# Altium PCB PCB_second.PcbDoc
Units mil, origin at the board's own origin, x right, y up, seen from the top; angles counter-clockwise.
Board outline 3555 x 3865 mil, 2 copper layers (Top Layer, Bottom Layer); 60 components, 127 nets, 227 pads, 81 vias.
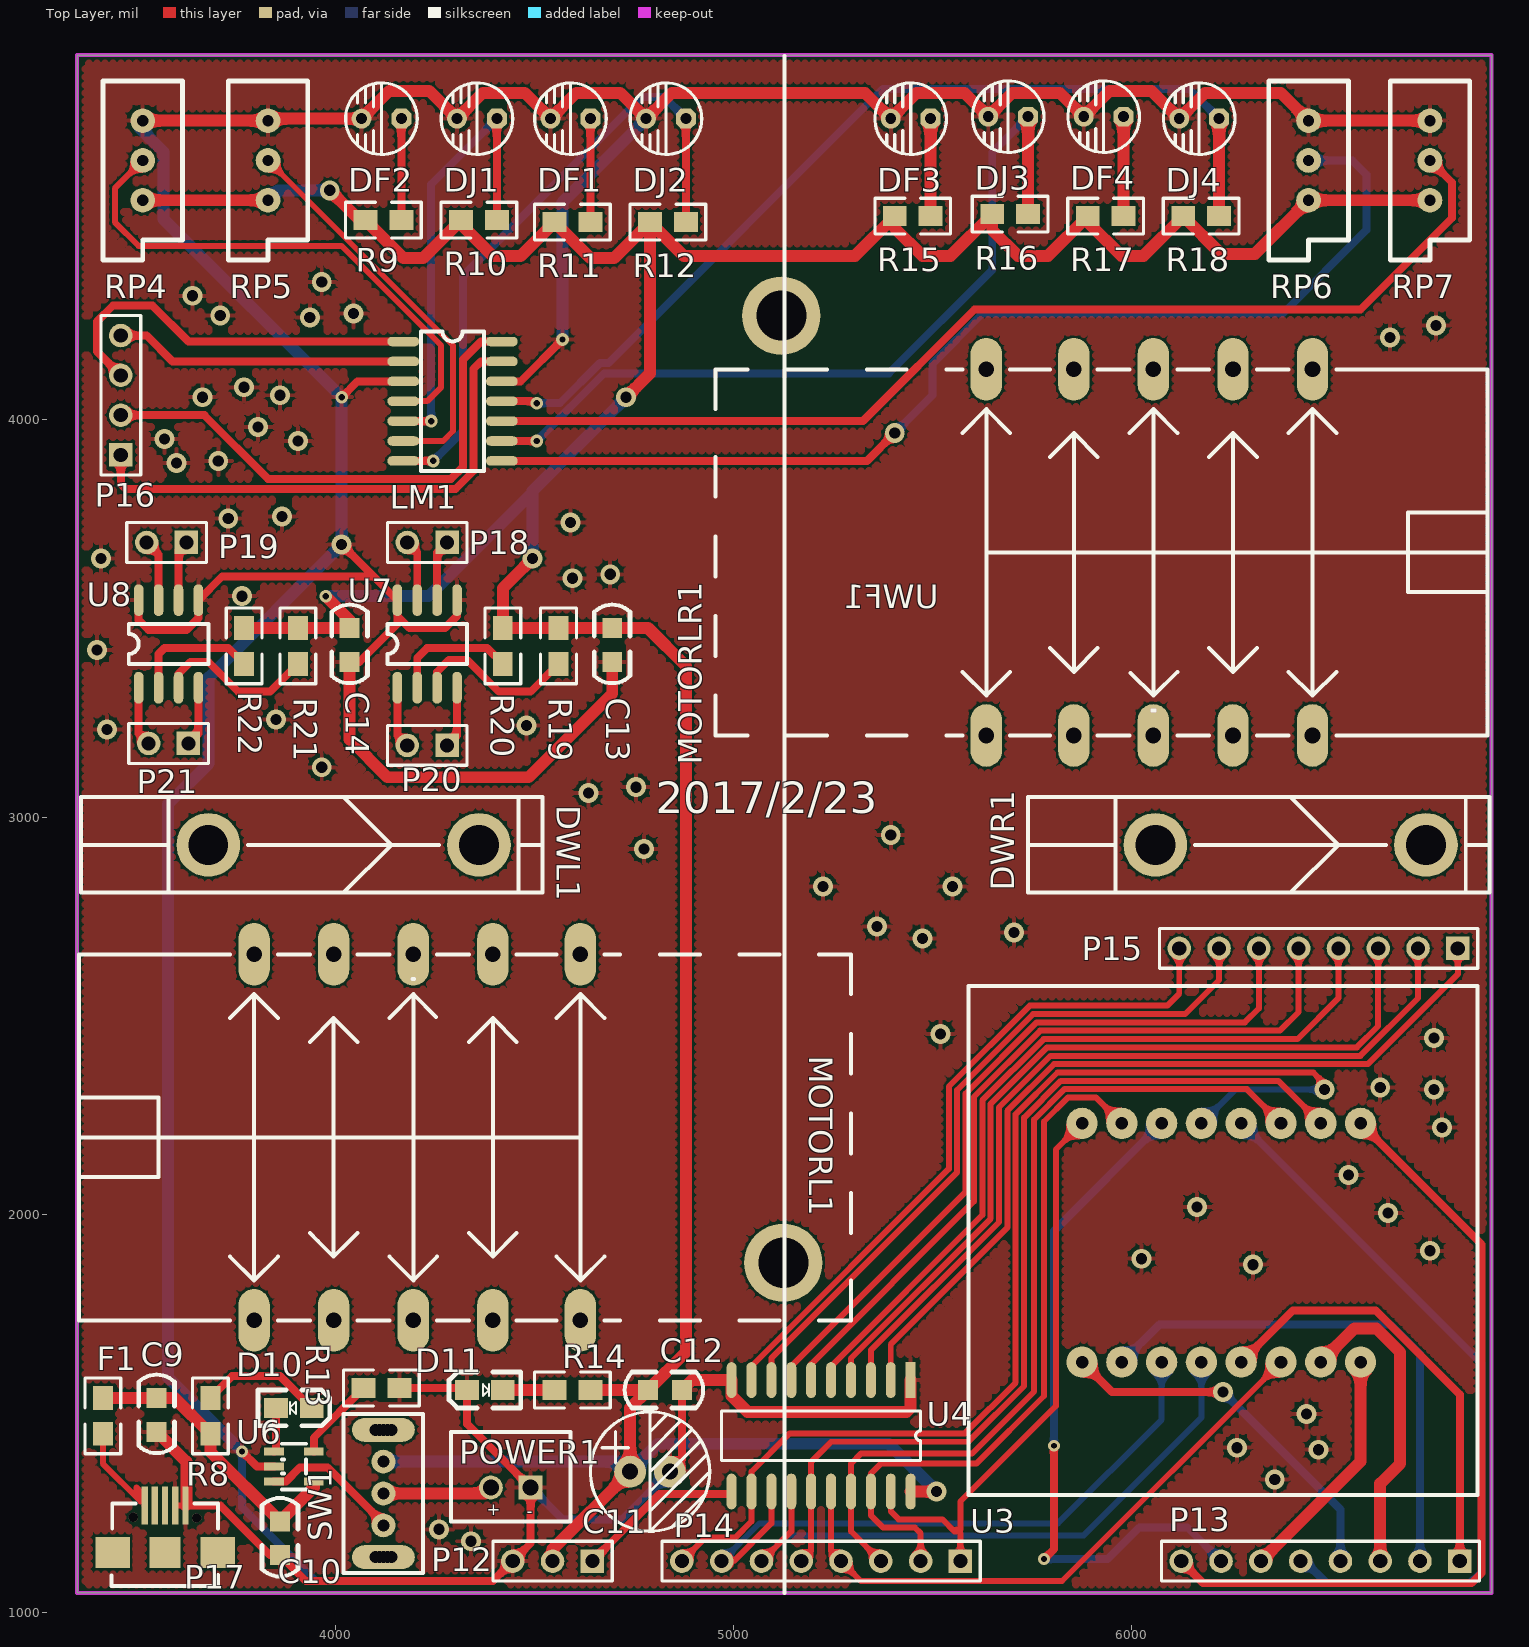
[diagram p0: Top Layer view]
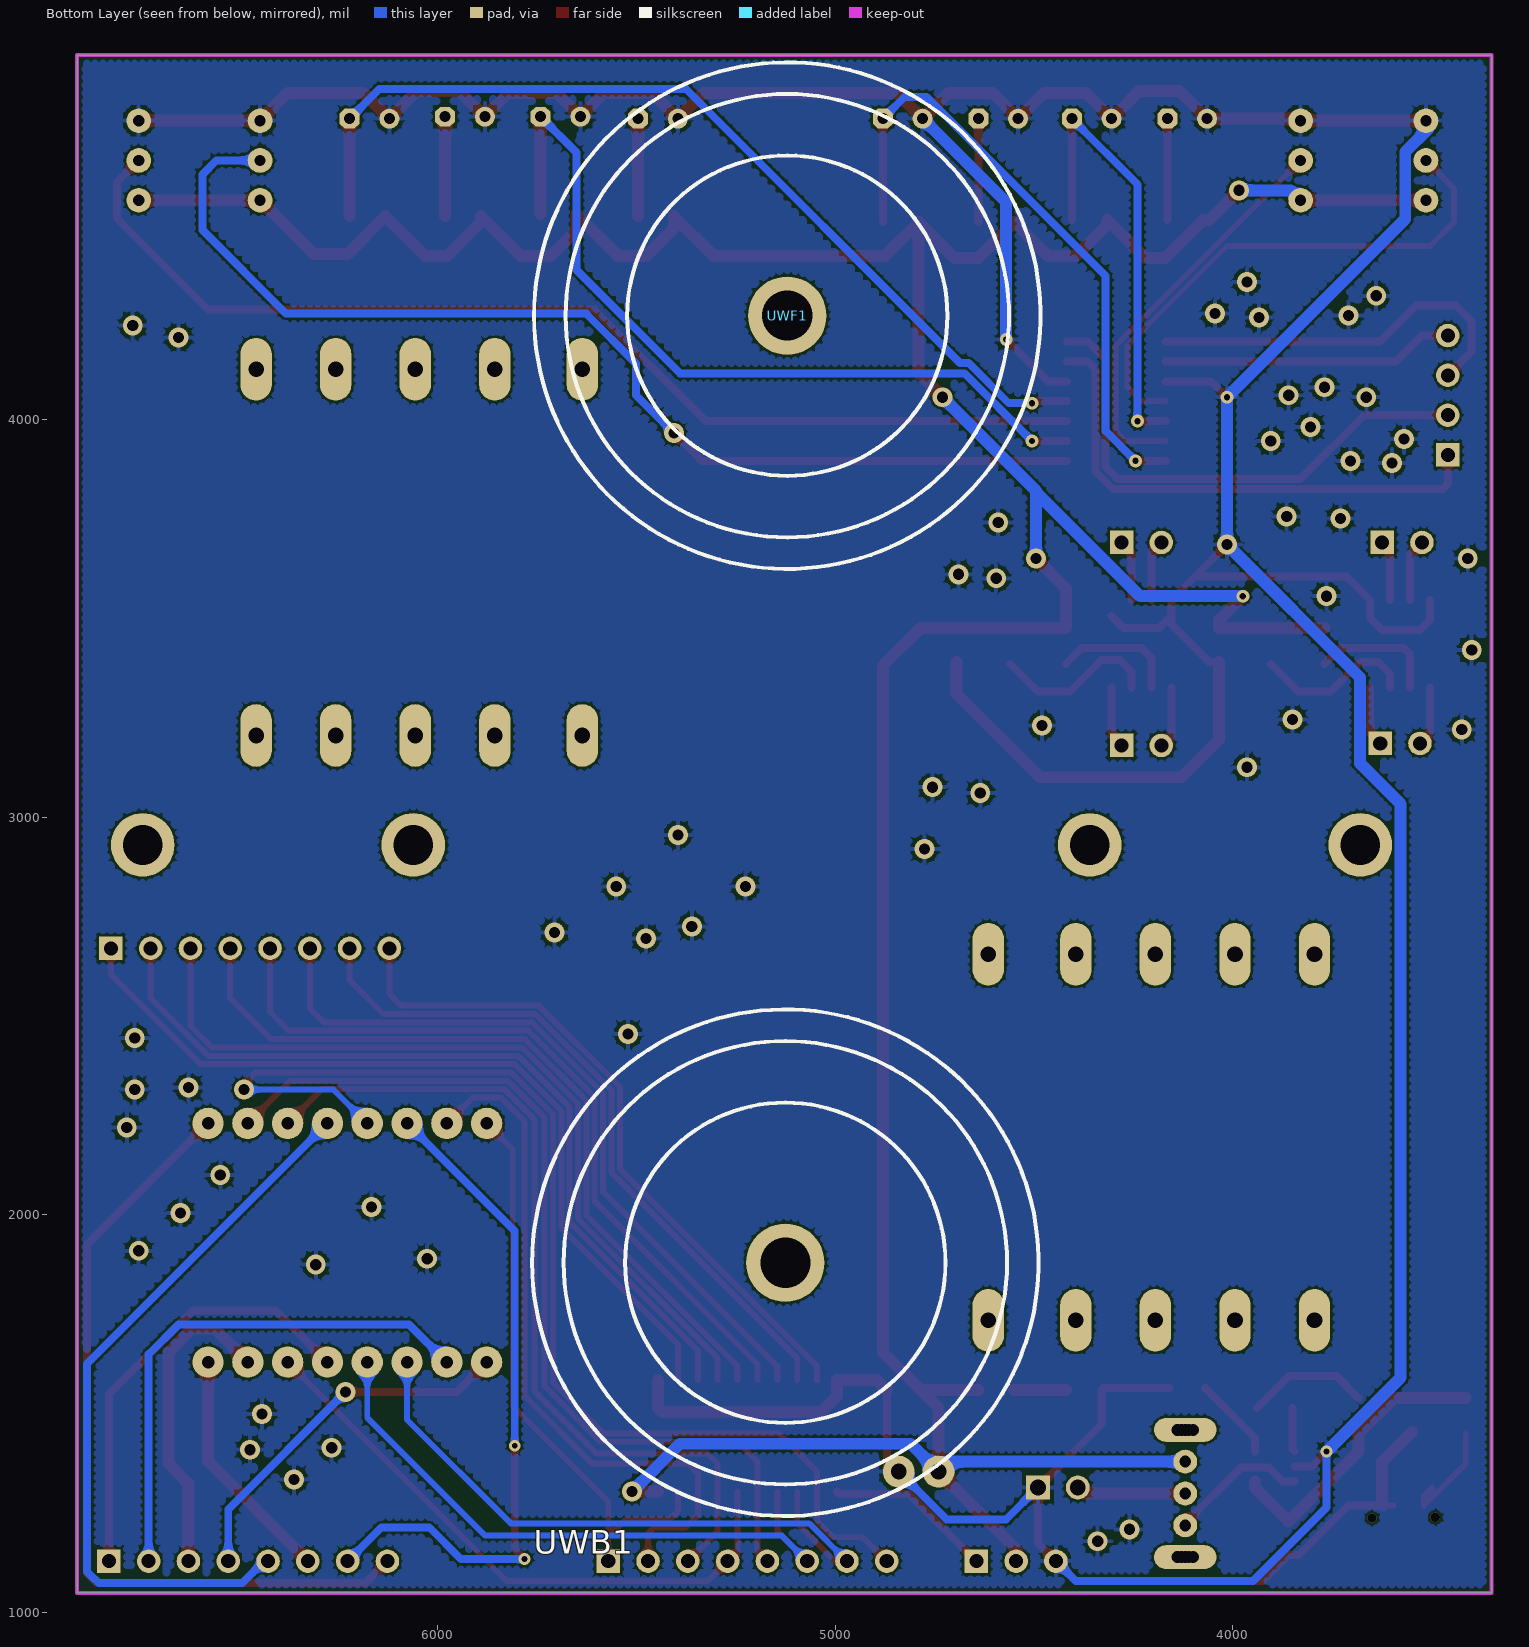
[diagram p1: Bottom Layer view, seen from below]

## Layer stack, top to bottom
Top Solder: solder mask 0.4, Solder Resist, Dk 3.5
Top Layer: signal copper 1.4
Dielectric 1: dielectric 12.6, FR-4, Dk 4.8
Bottom Layer: signal copper 1.4
Bottom Solder: solder mask 0.4, Solder Resist, Dk 3.5

## Board outline
3350,1050 3350,4915 6905,4915 6905,1050

## Design rules (kind name [scope] priority, off if disabled: settings)
Clearance [All] p1: gap=6
PolygonConnect [All] p1: connectstyle=Relief reliefconductorwidth=10 reliefentries=4 polygonreliefangle="90 Angle" airgapwidth=10
RoutingVias [All] p1: holewidth=28 width=50 viastyle="Through Hole" minholewidth=28 minwidth=50 maxholewidth=28 maxwidth=50
SolderMaskExpansion [All] p1: expansion=4
Width [All] p1: maxlimit=50 minlimit=10 preferedwidth=10
30 further rules are at their usual default settings.

## Components (designator, comment, footprint, x,y, rotation, side; value= is the part's Value field where it differs from the comment)
C9 "104" 0805C 3555,1540 r270 top
C10 "1uF" 0805C 3865,1230 r270 top
C11 "Cap Pol1" RB.1/.3 4740,1355 r180 top
C12 "104" 0805C 4785,1565 r0 top
C13 "104" 0805C 4700,3475 r270 top
C14 "104" 0805C 4040,3475 r270 top
D10 "LED" 0805D 3940,1515 r180 top
D11 "LED" 0805D 4330,1560 r0 top
DF1 "LED0" LED3 4640,4755 r180 top
DF2 "LED0" LED3 4165,4755 r180 top
DF3 "LED0" LED3 5495,4755 r180 top
DF4 "LED0" LED3 5980,4760 r180 top
DJ1 "LED0" LED3 4405,4755 r180 top
DJ2 "LED0" LED3 4880,4755 r180 top
DJ3 "LED0" LED3 5740,4760 r180 top
DJ4 "LED0" LED3 6220,4755 r180 top
DWL1 "DW" DW 3680,2930 r0 top
DWR1 "DW" DW 6060,2930 r0 top
F1 "500MA" 0805R 3415,1450 r90 top
LM1 "339" SOP-14 4170,4195 r0 top
MOTORL1 "MOTOR" MOTOR 4315,2195 r180 top
MOTORLR1 "MOTOR" MOTOR 5935,3665 r0 top
P12 "Header 3" HDR1X3 4645,1130 r180 top
P13 "Header 8" HDR1X8 6825,1130 r180 top
P14 "Header 8" HDR1X8 5570,1130 r180 top
P15 "Header 8" HDR1X8 6820,2670 r180 top
P16 "Header 4" HDR1X4 3460,3910 r90 top
P17 "MircoUSB" MircoUSB 3520,1260 r270 top
P18 "Header 2" HDR1X2 4280,3690 r180 top
P19 "Header 2" HDR1X2 3625,3690 r180 top
P20 "Header 2" HDR1X2 4280,3180 r180 top
P21 "Header 2" HDR1X2 3630,3185 r180 top
POWER1 "DC3.7V" XH2.54-2P 4490,1315 r180 top
R8 "2K" 0805R 3685,1450 r90 top
R9 "100R" 0805R 4165,4500 r180 top
R10 "510K" 0805R 4405,4500 r180 top
R11 "100R" 0805R 4640,4495 r180 top
R12 "510K" 0805R 4880,4495 r180 top
R13 "2K" 0805R 4160,1565 r180 top
R14 "2K" 0805R 4640,1560 r180 top
R15 "100R" 0805R 5495,4510 r180 top
R16 "510K" 0805R 5740,4515 r180 top
R17 "100R" 0805R 5980,4510 r180 top
R18 "510K" 0805R 6220,4510 r180 top
R19 "2K" 0805R 4560,3385 r90 top
R20 "2K" 0805R 4420,3385 r90 top
R21 "2K" 0805R 3905,3385 r90 top
R22 "2K" 0805R 3770,3385 r90 top
RP4 "100K" VR-5 3515,4750 r270 top
RP5 "100K" VR-5 3830,4750 r270 top
RP6 "100K" VR-5 6445,4750 r270 top
RP7 "100K" VR-5 6750,4750 r270 top
SW1 "SW SPDT" SW-1-2 4120,1220 r90 top
U3 "8-8" "8-8点阵 - duplicate" 6230,1935 r180 top
U4 "74HC573" SOP-20（1.27） 5445,1585 r270 top
U6 "TP4054" SOT-23-5 3945,1330 r90 top
U7 "L9110" SO-8 4155,3325 r90 top
U8 "L9110" SO-8 3505,3325 r90 top
UWB1 "UW" UW 5125,1880 r0 bottom
UWF1 "UW" UW 5120,4260 r0 bottom

## Footprints (in the part's own frame and the unit in brackets; to place one, negate y for a bottom-side part, rotate by r counter-clockwise, add the part's x,y. Pads: shape width x height; smd on the part's side, far side on the other; paste and mask are expansions set on the pad)
"8-8点阵 - duplicate" [mm]
  round 2 hole 0.8: 1(-8.78,7.74) 2(-6.24,7.74) 3(-3.7,7.74) 4(-1.16,7.74) 5(1.38,7.74) 6(3.92,7.74) 7(6.46,7.74) 8(9,7.74) 9(9,-7.5) 10(6.46,-7.5) 11(3.92,-7.5) 12(1.38,-7.5) 13(-1.16,-7.5) 14(-3.7,-7.5) 15(-6.24,-7.5) 16(-8.78,-7.5)
  silkscreen extent -16.24,-16.26 16.26,16.24
0805C [mil]
  rect 50x50 smd: 1(0,-5) 2(85,-5)
  silkscreen extent -59,-50 139,40
0805D [mil]
  rect 60x50 smd: 1(0,0) 2(90,0)
  silkscreen extent -45,-45 135,45
0805R [mil]
  rect 60x50 smd: 1(0,0) 2(90,0)
  silkscreen extent -50,-45 140,45
DW [mil]
  round 160 hole 100: 0(0,0) 0(680,0)
  silkscreen extent -320,-120 840,120
HDR1X2 [mm] "Connector; Header; 2 Position"
  rect 1.5x1.5 hole 0.9: 1(0,0)
  round 1.5 hole 0.9: 2(2.54,0)
  silkscreen extent -1.27,-1.27 3.81,1.27
HDR1X3 [mm] "Connector; Header; 3 Position"
  rect 1.5x1.5 hole 0.9: 1(0,0)
  round 1.5 hole 0.9: 2(2.54,0) 3(5.08,0)
  silkscreen extent -1.27,-1.27 6.35,1.27
HDR1X4 [mm] "Connector; Header; 4 Position"
  rect 1.5x1.5 hole 0.9: 1(0,0)
  round 1.5 hole 0.9: 2(2.54,0) 3(5.08,0) 4(7.62,0)
  silkscreen extent -1.27,-1.27 8.89,1.27
HDR1X8 [mm] "Connector; Header; 8 Position"
  rect 1.5x1.5 hole 0.9: 1(0,0)
  round 1.5 hole 0.9: 2(2.54,0) 3(5.08,0) 4(7.62,0) 5(10.16,0) 6(12.7,0) 7(15.24,0) 8(17.78,0)
  silkscreen extent -1.27,-1.27 19.05,1.27
LED3 [mm]
  oct 1.27x1.27 hole 0.7: A(0,0)
  round 1.27 hole 0.7: K(2.54,0)
  silkscreen extent -1.02,-2.29 3.55,2.29
MircoUSB [mm]
  rect 2.4x0.4 smd: 1(-0.25,0) 2(-0.25,0.65) 3(-0.25,1.3) 4(-0.25,1.95) 5(-0.25,2.6)
  rect 2x2.2 smd: 6(2.75,4.65) 7(2.75,-2.05)
  rect 2x2 smd: 8(2.75,1.3)
  silkscreen extent -0.37,-2.12 4.88,4.67
MOTOR [mm]
  oval 2x4 hole 1: 0(-7.62,11.684) 0(-7.62,-11.684) 0(-2.032,11.684) 0(-2.032,-11.684) 0(3.048,11.684) 0(3.048,-11.684) 0(8.128,11.684) 0(8.128,-11.684) 0(13.208,-11.684) 0(13.208,11.684)
  silkscreen extent -24.89,-11.68 24.38,11.68
RB.1/.3 [mil]
  round 80 hole 40: 1(0,0) 2(-100,0)
  silkscreen extent -200,-150 100,150
SO-8 [mil]
  oval 80x24 smd: 1(0,0) 2(0,-50) 3(0,-100) 4(0,-150) 5(220,-150) 6(220,-100) 7(220,-50) 8(220,0)
  silkscreen extent 60,-175 160,25
SOP-14 [mil]
  oval 80x24 smd: 1(0,0) 2(0,-50) 3(0,-100) 4(0,-150) 5(0,-200) 6(0,-250) 7(0,-300) 8(247.56,-300) 9(247.56,-250) 10(247.56,-200) 11(247.56,-150) 12(247.56,-100) 13(247.56,-50) 14(247.56,0)
  silkscreen extent 44,-325 203,25
SOP-20（1.27） [mil]
  rect 90x25 smd: 1(0,0)
  oval 90x25 smd: 2(0,-50) 3(0,-100) 4(0,-150) 5(0,-200) 6(0,-250) 7(0,-300) 8(0,-350) 9(0,-400) 10(0,-450) 11(280,-450) 12(280,-400) 13(280,-350) 14(280,-300) 15(280,-250) 16(280,-200) 17(280,-150) 18(280,-100) 19(280,-50) 20(280,0)
  silkscreen extent 78,-475 202,25
SOT-23-5 [mil]
  rect 20x50 smd: 1(75,100) 2(38,100) 3(0,100) 4(0,0) 5(75,0)
  silkscreen extent -20,20 95,80
SW-1-2 [mil]
  oval 60x157.48 hole 30: 0(-80,0) 0(240,0)
  round 60 hole 30: 1(80,0) 2(0,0) 3(160,0)
  silkscreen extent -120,-100 280,100
UW [mm]
  round 5 hole 3.2: 0(0,0)
  silkscreen extent -16.16,-16.17 16.17,16.17
VR-5 [mil]
  round 62 hole 28: 1(0,0) 2(100,0) 3(200,0)
  silkscreen extent -100,-100 350,100
XH2.54-2P [mil]
  rect 60x60 hole 40: 1(0,0)
  round 60 hole 40: 2(100,0)
  silkscreen extent -100,-140 200,85

## Part data
C9 C10 C12 C13 C14: library part CAP, "Capacitor"
C11: "Polarized Capacitor (Radial)"
DF1 DF2 DF3 DF4 DJ1 DJ2 DJ3 DJ4: "发光二极管"
DWL1 DWR1: "driving wheel"
F1: library part FUSE1, "Fuse"
LM1: library part Component_1
P12: "Header, 3-Pin"
P13 P14 P15: "Header, 8-Pin"
P16: "Header, 4-Pin"
P17: library part "Header 5", "5PIN"
P18 P19 P20 P21: "Header, 2-Pin"
POWER1: library part CON2, "Connector"
R8 R9 R10 R11 R12 R13 R14 R15 R16 R17 R18 R19 R20 R21 R22: library part RES2
RP4 RP5 RP6 RP7: library part POT2, "Potentiometer"
U3: library part 8-8点阵
UWB1 UWF1: "universal wheel"

## Via types
v1: diameter 50, hole 28, Top Layer to Bottom Layer, 61 vias
v2: diameter 30, hole 30, Top Layer to Bottom Layer, 8 vias
v3: diameter 32, hole 16, Top Layer to Bottom Layer, 7 vias
v4: diameter 30, hole 15, Top Layer to Bottom Layer, 3 vias
v5: diameter 23.62, hole 23.62, Top Layer to Bottom Layer, 2 vias

## Nets (pads, with @x,y where several pads share a name; then routed paths per layer and width w, separated by ;. In a path a pad name is that pad's centre, name@x,y a point inside that pad or via, vN(x,y) a via of type N, cw(c..) or ccw(c..) an arc to the next point about the centre after c; other vN are vias at no path point)
+5: C9.1 C10.1 F1.2 R8.1 U6.4 | length 735
  Top Layer w30: F1.2 C9.1 3595,1540 R8.1 3685,1405 C10.1 3945,1315 U6.4
CHOOSE: P12.1 U4.11 | length 422.5
  Top Layer w20: P12.1 4814,1299 4989,1299 U4.11
CHRG: SW1.2 U6.3 | length 352.5
  Top Layer w20: U6.3 3875,1330 3910,1365 3980,1365 4120,1225 SW1.2
D0: P15.1 U4.2 | length 2137.3
  Top Layer w15: U4.2 5395,1675 5688,1968 5688,2261.79 5805.21,2379 6594,2379 6820,2605 P15.1
D1: P15.2 U4.3 | length 2110.6
  Top Layer w15: U4.3 5345,1660 5667,1982 5667,2270.49 5796.51,2400 6575,2400 6720,2545 P15.2
D2: P15.3 U4.4 | length 2089.9
  Top Layer w15: U4.4 5295,1639.7 5646,1990.7 5646,2279.19 5787.81,2421 6566.3,2421 6620,2474.7 P15.3
D3: P15.4 U4.5 | length 1986.8
  Top Layer w15: U4.5 5245,1620 5625,2000 5625,2287.89 5779.11,2442 6417,2442 6520,2545 P15.4
D4: P15.5 U4.6 | length 1945.4
  Top Layer w15: U4.6 5195,1625 5604,2034 5604,2296.59 5770.41,2463 6373,2463 6420,2510 P15.5
D5: P15.6 U4.7 | length 1878.2
  Top Layer w15: U4.7 5145,1620 5583,2058 5583,2305.29 5761.71,2484 6285,2484 6320,2519 P15.6
D6: P15.7 U4.8 | length 1774.8
  Top Layer w15: U4.8 5095,1640 5562,2107 5562,2313.98 5753.02,2505 6135,2505 6220,2590 P15.7
D7: P15.8 U4.9 | length 1732.8
  Top Layer w15: U4.9 5045,1619.7 5541,2115.7 5541,2322.68 5744.32,2526 6090,2526 6120,2556 P15.8
D+: P17.3
D-: P17.2
ENBELL: 
ENDPY: 
ENLCD: 
ENLED: 
GND: C9.2 C10.2 C11.2 C12.2 C13.2 C14.2 D11.1 DF1.K DF2.K DF3.K DF4.K DJ1.K DJ2.K DJ3.K DJ4.K LM1.3 LM1.12 P12.3 P17.4 P17.5 POWER1.1 R13.1 RP4.1 RP5.1 RP6.1 RP7.1 U4.1 U4.10 U6.2 U7.5 U7.8 U8.5 U8.8 | length 15115.3
  Top Layer w15: P17.4 P17.5
  Top Layer w20: U8.8 3505,3495 3530,3470 3625,3470 3655,3500 U8.5 3715,3605 4095,3605 ; P17.5 3710.16,1269.84 3835,1145 C10.2 3925,1080 4395,1080 P12.3 4490,1175 POWER1.1 4330,1475 D11.1 4325,1565 R13.1 ; v4(3765,1405) 3802,1368 U6.2 ; v1(4015,3685) 4095,3605 ; v3(4015,4055) 4055,4095 LM1.3 ; C14.2 4060,3390 4155,3485 4155,3505 ; 4305,3505 4275,3475 4185,3475 4155,3505 ; LM1.12 4465,4095 v3(4570,4200) ; C11.2 4870,1385 C12.2 ; 4095,3605 U7.8 4155,3505
  Top Layer w30: RP4.1 RP5.1 3835,4755 DF2.K 4135,4825 4235,4825 DJ1.K 4370,4820 4475,4820 DF1.K 4605,4820 4715,4820 DJ2.K 4845,4820 5330,4820 DF3.K 5460,4820 5580,4820 DJ3.K 5700,4820 5820,4820 DF4.K 5945,4825 6050,4825 DJ4.K 6185,4820 6375,4820 RP6.1 RP7.1 ; C9.2 3625,1380 3625,1272.48 P17.5 ; C14.2 4035,3195 4130,3100 4485,3100 4695,3310 C13.2 ; C12.2 4895,1585 U4.10 4995,1545 5035,1505 5435,1505 5445,1515 U4.1
  Bottom Layer w20: v4(3765,1405) 3765,1265 3950,1080 4395,1080 P12.3 ; POWER1.1 4570,1235 4720,1235 C11.2
  Bottom Layer w30: RP4.1 3515,4730 3508.54,4730 3567,4671.54 3567,4503 v3(4015,4055) v1(4015,3685) 3680.53,3350.53 3680.53,3134.47 3579,3032.94 3579,1591 v4(3765,1405) ; v3(4570,4200) 4570,4545 DJ2.K
  other v1: 4340,1180 4260,1210 6360,1335 6470,1410 6265,1415 6440,1500 6305,1875 6025,1890 6750,1910 6645,2005 6165,2020 6545,2100 6780,2220 6760,2315 6625,2320 6760,2445 5520,2455 5475,2695 5705,2710 5360,2725 5225,2825 5550,2825 4775,2920 5395,2955 4635,3060 4755,3075 3965,3125 3425,3220 4480,3230 3850,3245 3400,3420 3765,3555 4595,3600 4690,3610 3410,3650 4590,3740 3730,3750 3865,3755 3600,3890 3705,3895 3905,3945 3570,3950 3805,3980 3665,4055 3860,4060 3770,4080 6650,4205 6765,4235 3935,4255 3710,4260 4045,4265 3640,4310 3965,4345
IN1+: DJ1.A LM1.5 R10.1 | length 1153.3
  Top Layer w20: LM1.5 v3(4240,3995) ; R10.1 DJ1.A
  Bottom Layer w20: v3(4240,3995) 4240,4590 DJ1.A
IN1-: LM1.4 RP4.2 | length 1346.9
  Top Layer w15: RP4.2 3445,4580 3445,4495 3505,4435 4015,4435 4265,4185 4265,4080 4230,4045 LM1.4
IN2+: DJ2.A LM1.7 R12.1 | length 1600.2
  Top Layer w20: LM1.7 v3(4245,3895) ; R12.1 DJ2.A
  Bottom Layer w20: v3(4245,3895) 4320,3970 4320,4360 4770,4810 4825,4810 DJ2.A
IN2-: LM1.6 RP5.2 | length 1018
  Top Layer w15: RP5.2@3830,4660 RP5.2 4295,4185 4295,3970 4270,3945 LM1.6
IN3+: DJ3.A LM1.9 R16.1 | length 2077.8
  Top Layer w20: LM1.9 v3(4505,3945)
  Top Layer w30: R16.1 DJ3.A
  Bottom Layer w20: v3(4505,3945) 4675,4115 5390,4115 5650,4375 5650,4670 DJ3.A
IN3-: LM1.8 RP6.2 | length 2759
  Top Layer w20: LM1.8 5335,3895 v1(5405,3965)
  Bottom Layer w20: v1(5405,3965) 5500,4060 5500,4140 5625,4265 6380,4265 6590,4475 6590,4615 6555,4650 RP6.2
IN4+: DJ4.A LM1.11 R18.1 | length 2400.8
  Top Layer w20: LM1.11 4490,4045 v3@4495,4040
  Top Layer w30: R18.1 DJ4.A
  Bottom Layer w20: v3@4505,4042.98 v3(4505,4040) 4563.23,4040 4664.23,4141 4686,4141 5375,4830 6145,4830 DJ4.A
IN4-: LM1.10 RP7.2 | length 2766.5
  Top Layer w20: LM1.10 5325,3995 5605,4275 6575,4275 6805,4505 6805,4595 RP7.2
ML1: P19.1 U8.6 | length 153.3
  Top Layer w20: U8.6 3605,3670 P19.1
ML2: P19.2 U8.7 | length 157.4
  Top Layer w20: P19.2 3555,3660 U8.7
MR1: P18.1 U7.6 | length 155.4
  Top Layer w20: U7.6 4255,3665 P18.1
MR2: P18.2 U7.7 | length 155.4
  Top Layer w20: P18.2 4205,3665 U7.7
NetC1_1: 
NetC4_2: 
NetC5_2: 
NetD1_A: 
NetD2_A: 
NetD3_A: 
NetD4_A: 
NetD5_A: 
NetD6_A: 
NetD7_A: 
NetD8_A: 
NetD9_A: 
NetD10_1: D10.1 R8.2 | length 310.9
  Top Layer w20: R8.2 3740,1595 3860,1595 D10.1
NetD10_2: D10.2 U6.1 | length 112.1
  Top Layer w20: U6.1 3850,1410 D10.2
NetD11_2: D11.2 R14.2 | length 130
  Top Layer w30: D11.2 R14.2
NetDF1_A: DF1.A R11.1 | length 260
  Top Layer w20: R11.1 DF1.A
NetDF2_A: DF2.A R9.1 | length 255
  Top Layer w20: R9.1 DF2.A
NetDF3_A: DF3.A R15.1 | length 245
  Top Layer w30: R15.1 DF3.A
NetDF4_A: DF4.A R17.1 | length 250
  Top Layer w30: R17.1 DF4.A
NetDS1_1: 
NetDS2_1: 
NetDS3_1: 
NetDS4_1: 
NetF1_1: F1.1 P17.1 | length 302.3
  Top Layer w15: F1.1 3415,1374.84 3510,1279.84 3510,1295 3500,1305 3500,1315 3520,1295 P17.1
NetLS1_1: 
NetP1_3: 
NetPOWER1_2: POWER1.2 SW1.1 | length 276.2
  Top Layer w30: SW1.1 4375,1300 POWER1.2
NetQ1_2: 
NetQ2_2: 
NetQ3_2: 
NetQ4_2: 
NetQ5_2: 
NetR13_2: R13.2 U6.5 | length 211.8
  Top Layer w20: U6.5 3945,1440 R13.2
NetR19_1: R19.1 U7.3 | length 419.6
  Top Layer w20: U7.3 4255,3365 4285,3395 4330,3395 4410,3315 4490,3315 R19.1
NetR20_1: R20.1 U7.2 | length 316.9
  Top Layer w20: U7.2 4205,3400 4230,3425 4380,3425 R20.1
NetR21_1: R21.1 U8.3 | length 407.5
  Top Layer w20: U8.3 3605,3360 3635,3390 3680,3390 3755,3315 3835,3315 R21.1
NetR22_1: R22.1 U8.2 | length 322.8
  Top Layer w20: U8.2 3555,3410 3570,3425 3730,3425 R22.1
OAL: P21.2 U8.1 | length 150.4
  Top Layer w20: U8.1 3505,3210 P21.2
OAR: P20.2 U7.1 | length 155.4
  Top Layer w20: U7.1 4155,3205 P20.2
OBL: P21.1 U8.4 | length 150.4
  Top Layer w20: P21.1 3655,3210 U8.4
OBR: P20.1 U7.4 | length 155.4
  Top Layer w20: P20.1 4305,3205 U7.4
OUT1: LM1.2 P16.4 | length 736.9
  Top Layer w20: P16.4 3525,4210 3590,4145 LM1.2
OUT2: LM1.1 P16.3 | length 983.7
  Top Layer w20: P16.3 3400,4170 3400,4245 3440,4285 3540,4285 3630,4195 LM1.1
OUT3: LM1.14 P16.2 | length 1324.9
  Top Layer w20: P16.2 3670,4010 3830,3850 4290,3850 4320,3880 4320,4150 4365,4195 LM1.14
OUT4: LM1.13 P16.1 | length 1319.4
  Top Layer w20: P16.1 3460,3836.8 3472.8,3824 4300.77,3824 4346,3869.23 4346,4126 4365,4145 LM1.13
P00: 
P01: 
P02: 
P03: 
P04: 
P05: 
P06: 
P07: 
P10: 
P11: 
P12: 
P13: 
P14: 
P15: 
P16: 
P17: 
P20: 
P21: 
P22: 
P23: 
P24: 
P25: 
P26: 
P27: 
P30: 
P31: 
P32: 
P33: 
P34: 
P35: 
P36: 
P37: 
Q0: P14.1 U3.9 U4.19 | length 1485.9
  Top Layer w15: U4.19 5395,1255 5415,1235 5525,1235 5555,1205 ; P14.1 5570,1200 5565,1205 ; U3.9 5810,2164.61 5810,1520 5570,1280 5570,1210 5565,1205 ; 5555,1205 5560,1210 5565,1205 ; 5555,1205 5565,1205
Q1: P14.2 U3.10 U4.18 | length 1771.7
  Top Layer w15: P14.2 5470,1200 5456,1214 5376,1214 5345,1245 U4.18 5345,1350 5370,1375 5610,1375 5780,1545 5780,2235 5840,2295 5910.94,2295 U3.10
Q2: P14.3 U3.14 U4.17 | length 2182.5
  Top Layer w15: P14.3 5295,1205 U4.17 5295,1375 5320,1400 5599,1400 5755,1556 5755,2239.7 5831.3,2316 6289.94,2316 U3.14
Q3: P14.4 U3.3 U4.16 | length 1539.7
  Top Layer w15: U4.16 5245,1155 P14.4 5320,1080 5825.39,1080 U3.3
Q4: P14.5 U3.15 U4.15 | length 2376.7
  Top Layer w15: P14.5 5195,1155 U4.15 5195,1380 5245,1430 5590,1430 5730,1570 5730,2244.4 5822.6,2337 6368.94,2337 U3.15
Q5: P14.6 U3.5 U4.14 | length 1600.7
  Top Layer w15: P14.6 5145,1205 U4.14
  Bottom Layer w15: P14.6 5135,1195 5880,1195 6175.67,1490.67 U3.5
Q6: P14.7 U3.6 U4.13 | length 1641.9
  Top Layer w15: P14.7 5000,1130 5095,1225 U4.13
  Bottom Layer w15: P14.7 5065,1225 5815,1225 6075.67,1485.67 U3.6
Q7: P14.8 U3.12 U4.12 | length 2963
  Top Layer w15: P14.8 4930,1190 5005,1190 5045,1230 U4.12 5045,1355 5141,1451 5581.3,1451 5709,1578.7 5709,2253.1 5813.9,2358 6457,2358 6485,2330 v1(6485,2315)
  Bottom Layer w15: U3.12 6260.39,2315 v1(6485,2315)
Q8: P13.1 U3.4 | length 1109.4
  Top Layer w20: U3.4 6405.39,1760 6613.84,1760 6825,1548.84 P13.1
Q9: P13.2 U3.7 | length 1339.6
  Bottom Layer w20: U3.7 6070.39,1725 6650,1725 6725,1650 P13.2
Q10: P13.3 U3.2 | length 805
  Top Layer w30: U3.2 6560.39,1715 6615,1715 6675,1655 6675,1375 6625,1325 P13.3
Q11: P13.4 U3.8 | length 922.7
  Top Layer w20: U3.8 5950.94,1555 v1@6220,1555
  Bottom Layer w20: v1(6230,1555) 6525,1260 P13.4
Q12: P13.5 U3.13 | length 1866.8
  Bottom Layer w20: U3.13 6880,1625.94 6880,1103.32 6861.15,1084.47 6859.47,1084.47 6850,1075 6490,1075 6435,1130 P13.5
Q13: P13.6 U3.1 | length 604.1
  Top Layer w30: P13.6 6575.67,1380.67 U3.1
Q14: P13.7 U3.11 | length 1731.1
  Top Layer w20: v4(5780,1135) 5805,1160 v4(5805,1420)
  Bottom Layer w20: v4(5780,1135) 5940,1135 6020,1215 6140,1215 P13.7 ; v4(5805,1420) 5805,1959.61 U3.11
Q15: P13.8 U3.16 | length 2044.5
  Top Layer w20: P13.8 6180,1075 6855,1075 6880,1100 6880,1925.94 U3.16
RST: 
VCC: C11.1 C12.1 C13.1 C14.1 P12.2 R9.2 R10.2 R11.2 R12.2 R14.1 R15.2 R16.2 R17.2 R18.2 R19.2 R20.2 R21.2 R22.2 RP4.3 RP5.3 RP6.3 RP7.3 SW1.3 U4.20 | length 10723.8
  Top Layer w30: RP4.3 RP5.3 ; R22.2 R21.2 C14.1 4035,3495 v3@3980,3550 ; v1(3985,4575) 4060,4500 R9.2 4170,4405 4220,4405 R10.2 4315,4490 4395,4410 4465,4410 R11.2 4640,4405 4700,4405 R12.2 ; v1(4495,3650) 4420,3575 R20.2 R19.2 C13.1 4785,3475 4880,3380 4880,1655 C12.1 ; P12.2 4545,1160 C11.1 4740,1515 C12.1 ; R14.1 C12.1 ; v1(4730,4055) 4790,4115 R12.2 ; U4.20 v1(5510,1305) ; RP7.3 RP6.3 6310,4415 6225,4415 R18.2 6030,4410 5975,4410 5890,4495 R17.2 5790,4410 5715,4410 5650,4475 R16.2 5545,4410 5475,4410 5405,4480 R15.2 5305,4410 4875,4410 R12.2
  Bottom Layer w30: RP5.3 3855,4575 v1(3985,4575) ; v3(3975,3555) 4233.75,3555 4495,3816.25 ; SW1.3 4715,1380 C11.1 4810,1425 5390,1425 v1(5510,1305) ; v1(4495,3650) 4495,3816.25 ; v1(4730,4055) 4495,3820 4495,3816.25
X1: 
X2: 
pads on no net: DWL1.0 DWR1.0 MOTORL1.0 MOTORLR1.0 P17.6 P17.7 P17.8 SW1.0 UWB1.0 UWF1.0
copper on no net:
  other v2: 4100,1140 4110,1140 4130,1140 4140,1140 4100,1460 4110,1460 4130,1460 4140,1460
  other v5: 3650.71,1238.35 3491.65,1240.31

## Polygon pours and split planes (outlines as drawn)
GND on Top Layer "Top Layer-No Net" (hatched 90Degree grid 20 track 20, remove dead copper, pour order 5): 3350,4925 3350,1050 6925,1050 6925,4925
GND on Bottom Layer "Top Layer-No Net" (hatched 90Degree grid 20 track 20, remove dead copper, pour order 7): 3350,4925 3350,1050 6925,1050 6925,4925

## Keep-outs
Keep-Out Layer:
  the board outline again, w10

## Silkscreen, mask and mechanical layers (free items; w line width, h text height)
Top Overlay:
  lines w10: 5127.5,1050 5127.5,4912.5
  text "2017/2/23" at 4805,3010 h80
  text "+" at 4380,1245 h30
  text "-" at 4480,1240 h30